# EAGLE board board (EAGLE 7.7.0)
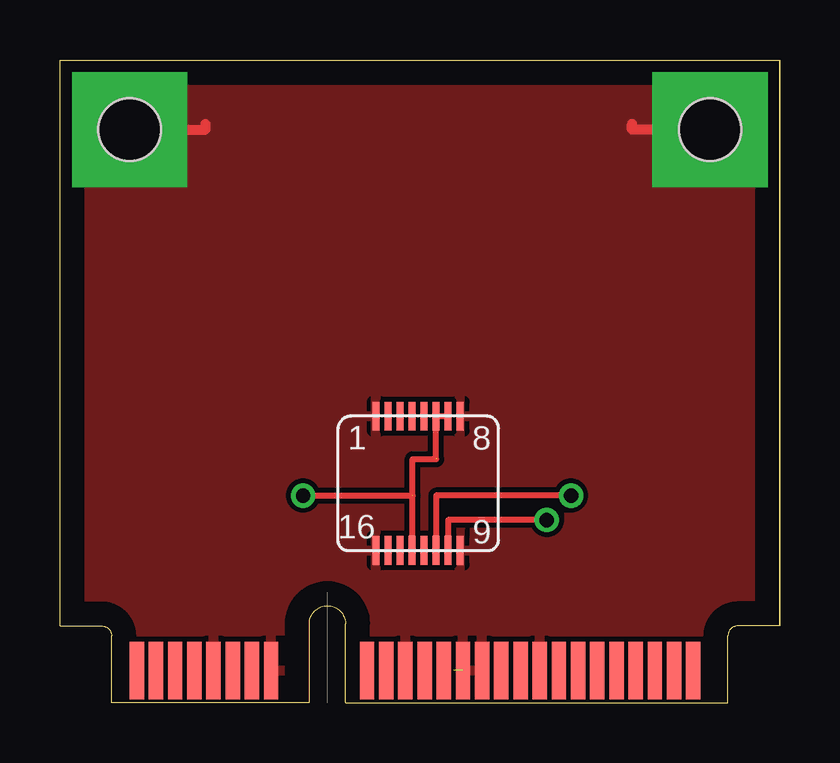
[diagram p0: board, top side]
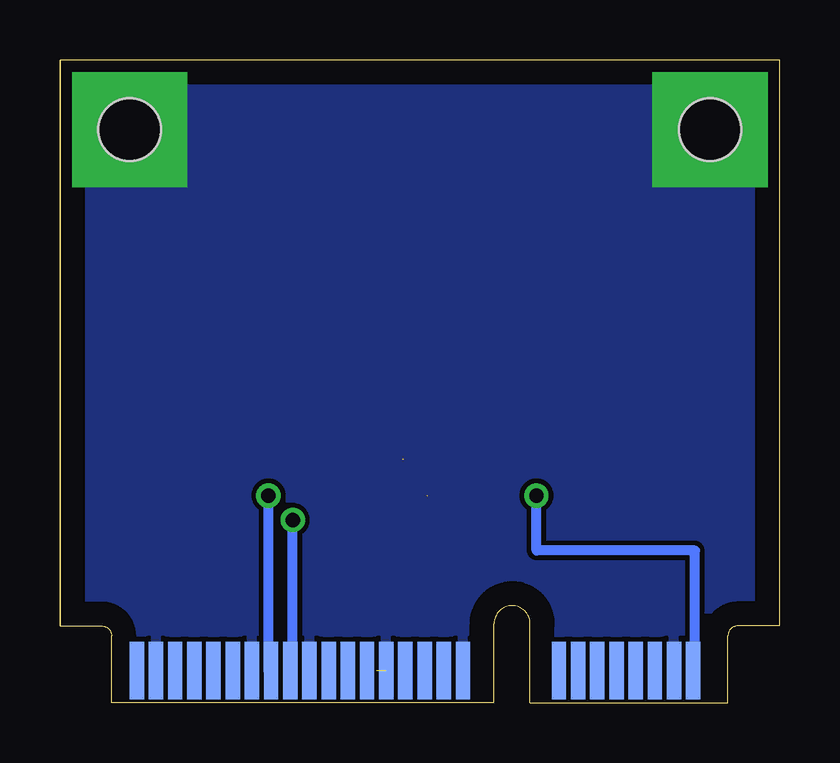
[diagram p1: board, bottom side, seen from below]

Size 30 x 26.8 mm. Coordinates in mm from the lower left corner, seen from the top.
Copper layers (1*16): Top 0.035mm / dielectric 1.5mm / Bottom 0.035mm
Design rules "default": minimum track width 10mil, minimum drill 24mil, track to track 8mil, track to pad 8mil, pad to pad 8mil, via to via 8mil, smd to smd 8mil, copper to edge 40mil, drill to drill 8mil, minimum pad ring 10mil, minimum via ring 8mil, stop-mask expansion 4mil, vias tented up to drill 0mil, thermal gap 10mil

## Footprints (pad centres in the part's own frame; a part is rotated, then mirrored left to right if it is on the bottom)
HALF-MINI-PCI-E = smd 0.6 x 2.4: 1 -7.95,1.35; 3 -7.15,1.35; 5 -6.35,1.35; 7 -5.55,1.35; 9 -4.75,1.35; 11 -3.95,1.35; 13 -3.15,1.35; 15 -2.35,1.35; 17 1.65,1.35; 19 2.45,1.35; 21 3.25,1.35; 23 4.05,1.35; 25 4.85,1.35; 27 5.65,1.35; 29 6.45,1.35; 31 7.25,1.35; 33 8.05,1.35; 35 8.85,1.35; 37 9.65,1.35; 39 10.45,1.35; 41 11.25,1.35; 43 12.05,1.35; 45 12.85,1.35; 47 13.65,1.35; 49 14.45,1.35; 51 15.25,1.35 | smd 0.6 x 2.4 bottom: 2 -7.55,1.35; 4 -6.75,1.35; 6 -5.95,1.35; 8 -5.15,1.35; 10 -4.35,1.35; 12 -3.55,1.35; 14 -2.75,1.35; 16 -1.95,1.35; 18 2.05,1.35; 20 2.85,1.35; 22 3.65,1.35; 24 4.45,1.35; 26 5.25,1.35; 28 6.05,1.35; 30 6.85,1.35; 32 7.65,1.35; 34 8.45,1.35; 36 9.25,1.35; 38 10.05,1.35; 40 10.85,1.35; 42 11.65,1.35; 44 12.45,1.35; 46 13.25,1.35; 48 14.05,1.35; 50 14.85,1.35; 52 15.65,1.35 | drill 2.6 pad 4.8 square: GND@1 -8.25,23.9; GND@2 15.95,23.9 | hole 2.6: -8.25,23.9; 15.95,23.9
MOLEX_0541020164 = smd 0.3 x 1.2: P1 -1.778,5.6; P2 -1.278,5.6; P3 -0.778,5.6; P4 -0.278,5.6; P5 0.222,5.6; P6 0.722,5.6; P7 1.222,5.6; P8 1.722,5.6; P9 1.722,0; P10 1.222,0; P11 0.722,0; P12 0.222,0; P13 -0.278,0; P14 -0.778,0; P15 -1.278,0; P16 -1.778,0

## Placement (x,y rotation side)
U$1  HALF-MINI-PCI-E  [HALF-MINI-PCI-E]  11.15,0 0 top
U$2  MOLEX_0541020164MOLEX  [MOLEX_0541020164]  14.96,6.35 0 top

## Library data of the parts
U$1 = mini-pci-e
U$2 = wiiBL

## Nets
3V3: U$1.2 U$2.P6 U$2.P7 U$2.P13
D+: U$1.38 U$2.P11
D-: U$1.36 U$2.P10
GND: U$1.4 U$1.9 U$1.15 U$1.18 U$1.21 U$1.26 U$1.27 U$1.29 U$1.34 U$1.35 U$1.40 U$1.50 U$1.GND@1 U$1.GND@2 U$2.P1 U$2.P8 U$2.P9 U$2.P16

## Tracks (layer width: path | path; a pad name or v marks a point on that pad's centre or on a via)
3V3  (via drill 0.6)  (2 unrouted)
  Top 0.254: v10.13,8.64 14.68,8.64 U$2.P13 | 14.71,8.64 14.71,10.16 15.68,10.16 U$2.P6 U$2.P7
  Bottom 0.406: U$1.2 3.53,1.35 3.53,6.35 10.13,6.35 v10.13,8.64
D+  (via drill 0.6)
  Top 0.254: v21.31,8.64 15.68,8.64 U$2.P11
  Bottom 0.406: U$1.38 21.31,1.35 v21.31,8.64
D-  (via drill 0.6)
  Top 0.254: v20.29,7.62 16.18,7.62 U$2.P10
  Bottom 0.406: U$1.36 20.29,1.35 v20.29,7.62
GND  (1 unrouted)
  Top 0.406: U$1.GND@1 6.07,23.9 6.07,24.13 | U$1.GND@2 23.85,23.9 23.85,24.13
  pour Top: -1.55,27.94 -1.55,-1.27 31.47,-1.27 31.47,27.94
  pour Bottom: -1.55,27.94 -1.55,-1.27 31.47,-1.27 31.47,27.94